# EAGLE board dust_environment_sensor_v2 (EAGLE 6.4)

Size 70 x 70 mm. Coordinates in mm from the lower left corner, seen from the top.
Outline: circle at 35,35 radius 35
Copper layers (1+2*15+16): Top 0.0356mm / dielectric 0.2007mm / VCC 0.017mm / dielectric 1.5mm / GND 0.017mm / dielectric 0.2007mm / Bottom 0.0356mm
Design rules "LaenPCBOrder_4LAYER": minimum track width 6mil, minimum drill 13mil, track to track 6mil, track to pad 6mil, pad to pad 6mil, via to via 6mil, smd to smd 6mil, copper to edge 15mil, drill to drill 6mil, minimum pad ring 7mil, minimum via ring 7mil, stop-mask expansion 4mil, vias tented up to drill 0mil, thermal gap 10mil
Net classes: 0 default: width 0.254 mm, drill 0.33 mm, clearance 0.152 mm; 1 power: width 0.254 mm, drill 0.33 mm, clearance 0.152 mm

## Footprints (pad centres in the part's own frame; a part is rotated, then mirrored left to right if it is on the bottom)
C0603 = smd 1.1 x 1: 1 -0.85,0; 2 0.85,0
EIA3216-KIT = smd 1.9 x 1.6: A 1.65,0; C -1.65,0
EIA7343 = smd 2.55 x 2.7: A 3.17,0; C -3.17,0
TQFP44 = smd 1.5 x 0.5: 1 -5.8,4; 2 -5.8,3.2; 3 -5.8,2.4; 4 -5.8,1.6; 5 -5.8,0.8; 6 -5.8,0; 7 -5.8,-0.8; 8 -5.8,-1.6; 9 -5.8,-2.4; 10 -5.8,-3.2; 11 -5.8,-4; 23 5.8,-4; 24 5.8,-3.2; 25 5.8,-2.4; 26 5.8,-1.6; 27 5.8,-0.8; 28 5.8,0; 29 5.8,0.8; 30 5.8,1.6; 31 5.8,2.4; 32 5.8,3.2; 33 5.8,4 | smd 0.5 x 1.5: 12 -4,-5.8; 13 -3.2,-5.8; 14 -2.4,-5.8; 15 -1.6,-5.8; 16 -0.8,-5.8; 17 0,-5.8; 18 0.8,-5.8; 19 1.6,-5.8; 20 2.4,-5.8; 21 3.2,-5.8; 22 4,-5.8; 34 4,5.8; 35 3.2,5.8; 36 2.4,5.8; 37 1.6,5.8; 38 0.8,5.8; 39 0,5.8; 40 -0.8,5.8; 41 -1.6,5.8; 42 -2.4,5.8; 43 -3.2,5.8; 44 -4,5.8
BX0036 = drill 1.1 pad 2.54: NEG 27.8,0 | drill 1.1 pad 2.54 square: POS -27.8,0 | hole 3.8: 15.9,0; -15.9,0
2X3 = drill 1.016 pad 1.88 octagon: 1 0,0; 2 0,2.54; 3 2.54,0; 4 2.54,2.54; 5 5.08,0; 6 5.08,2.54
XBEE_1-10_SMT = smd 2.29 x 0.89: 1 -12.395,9; 2 -9.605,7; 3 -12.395,5; 4 -9.605,3; 5 -12.395,1; 6 -9.605,-1; 7 -12.395,-3; 8 -9.605,-5; 9 -12.395,-7; 10 -9.605,-9
XBEE_11-20_SMT = smd 2.29 x 0.89: 11 12.395,-9; 12 9.605,-7; 13 12.395,-5; 14 9.605,-3; 15 12.395,-1; 16 9.605,1; 17 12.395,3; 18 9.605,5; 19 12.395,7; 20 9.605,9
1X01 = drill 1.016 pad 1.88: 1 0,0
1X06 = drill 1.016: 1 0,0; 2 2.54,0; 3 5.08,0; 4 7.62,0; 5 10.16,0; 6 12.7,0
AVR_ICSP = drill 1.016 pad 1.88 octagon: 1 -1.27,5.08; 2 1.27,5.08; 3 -1.27,2.54; 4 1.27,2.54; 5 -1.27,0; 6 1.27,0; 7 -1.27,-2.54; 8 1.27,-2.54; 9 -1.27,-5.08; 10 1.27,-5.08
CHIPLED_0805 = smd 1.2 x 1.2: A 0,-1.05; C 0,1.05
R0603 = smd 1 x 1.1: 1 -0.85,0; 2 0.85,0
STAND-OFF = hole 3.302: 0,0
LGA16_ST = smd 1 x 0.3: 1 -1.55,1; 2 -1.55,0.5; 3 -1.55,0; 4 -1.55,-0.5; 5 -1.55,-1; 9 1.55,-1; 10 1.55,-0.5; 11 1.55,0; 12 1.55,0.5; 13 1.55,1 | smd 0.3 x 1: 6 -0.5,-1.55; 7 0,-1.55; 8 0.5,-1.55; 14 0.5,1.55; 15 0,1.55; 16 -0.5,1.55
QFN24_SILICON_LABS = smd 1 x 0.3: 1 -2.125,1.25; 2 -2.125,0.75; 3 -2.125,0.25; 4 -2.125,-0.25; 5 -2.125,-0.75; 6 -2.125,-1.25; 13 2.125,-1.25; 14 2.125,-0.75; 15 2.125,-0.25; 16 2.125,0.25; 17 2.125,0.75; 18 2.125,1.25 | smd 0.3 x 1: 7 -1.25,-2.125; 8 -0.75,-2.125; 9 -0.25,-2.125; 10 0.25,-2.125; 11 0.75,-2.125; 12 1.25,-2.125; 19 1.25,2.125; 20 0.75,2.125; 21 0.25,2.125; 22 -0.25,2.125; 23 -0.75,2.125; 24 -1.25,2.125 | smd 2.75 x 2.75: PAD 0,0
CL6_TAOS = smd 1 x 0.7: 1 -1.45,-1.05; 2 1.45,-1.05; 3 1.45,0; 4 1.45,1.05; 5 -1.45,1.05; 6 -1.45,0
AMN41121 = drill 0.635 pad 1.676: GND 0,-2.54; OUT -2.54,0; VDD 0,2.54
LGA16_4X4_ST = smd 1 x 0.3: 1 -2,0.975; 2 -2,0.325; 3 -2,-0.325; 4 -2,-0.975; 9 2,-0.975; 10 2,-0.325; 11 2,0.325; 12 2,0.975 | smd 0.3 x 1: 5 -0.975,-2; 6 -0.325,-2; 7 0.325,-2; 8 0.975,-2; 13 0.975,2; 14 0.325,2; 15 -0.325,2; 16 -0.975,2
SOT23-3 = smd 0.8 x 0.9: 1 -0.95,-1; 2 0.95,-1; 3 0,1.1
ABS07 = smd 1.1 x 1.9: 1 -1.25,0; 2 1.25,0

## Placement (x,y rotation side)
C1  100n  [C0603]  62,52 0 top
C2  10u  [C0603]  62,49 0 top
C3  100n  [C0603]  59,19 0 top
C4  100u  [EIA3216-KIT]  9,42 0 top
C5  100n  [C0603]  57,33 0 top
C6  680u  [EIA7343]  22,47 90 top
C7  4.7u  [C0603]  54,29 270 top
C8  100n  [C0603]  44,55 270 top
C9  100n  [C0603]  27,54 90 top
C10  100n  [C0603]  6.5,28.5 180 top
C11  10p  [C0603]  41.5,63 0 top
C12  10p  [C0603]  34,63 180 top
C13  100n  [C0603]  54,22 90 top
C14  10u  [C0603]  55,43 90 top
C15  100n  [C0603]  63,43 90 top
C16  1u  [C0603]  14.9,41.54 270 top
C17  1u  [C0603]  15.46,49.08 0 top
C18  100n  [C0603]  19,29 0 top
IC2  ATMEGA644A  [TQFP44]  36,54 90 top
J1  3.6V Lithium C cell  [BX0036]  35,36 180 bottom
J2  EXP  [2X3]  50,57 90 top
J3  XBEE_1-10SMT  [XBEE_1-10_SMT]  35,20 0 top
J4  XBEE_11-20SMT  [XBEE_11-20_SMT]  35,20 0 top
JP4  M01PTH  [1X01]  63,19 0 top
JP5  M01PTH  [1X01]  18.75,7.94 0 top
JP6  M01PTH  [1X01]  7,46.75 0 top
JP7  M01PTH  [1X01]  9,17 0 top
JP8  [1X06]  3,41 270 top
JP9  JTAG  [AVR_ICSP]  35,67 270 top
LED2  [CHIPLED_0805]  46.5,51.75 270 top
LED3  [CHIPLED_0805]  46.5,50 270 top
R1  2.2k  [R0603]  50.95,53 90 top
R2  2.2k  [R0603]  53,53 90 top
R3  15  [R0603]  56,35.54 270 top
R4  10k  [R0603]  9.75,27.5 270 top
R5  0R DNP  [R0603]  11,46 270 top
R6  10k  [R0603]  20.24,54.02 180 top
STANDOFF1  STAND-OFF  [STAND-OFF]  14,13 0 top
STANDOFF2  STAND-OFF  [STAND-OFF]  14,58 0 top
STANDOFF3  STAND-OFF  [STAND-OFF]  57,13 0 top
STANDOFF4  STAND-OFF  [STAND-OFF]  57,58 0 top
U2  LIS3DH  [LGA16_ST]  58.18,46.05 0 top
U3  SI7005  [QFN24_SILICON_LABS]  59.09,29.06 270 top
U4  TSL2560  [CL6_TAOS]  58.72,22.43 0 top
U5  AMN41121  [AMN41121]  22,61 0 top
U6  L3GD20  [LGA16_4X4_ST]  59,40 0 top
U7  MCP1700-3.3V  [SOT23-3]  15.54,45.78 180 top
X2  32.768KHz  [ABS07]  37.75,63 0 top

## Library data of the parts
C1-C3 C5 C7-C18 = rcl
C4 C6 = SparkFun-Capacitors
IC2 = atmel; MPN: ATMEGA644PV-10AU; OC_FARNELL: 1455123; OC_NEWARK: 58M3748
J1 J3 J4 U2-U7 = Cool_Electricity
J2 JP4-JP7 JP9 = SparkFun-Connectors
JP8 = custom
LED2 LED3 = led
R1-R6 = resistor
STANDOFF1-STANDOFF4 = SparkFun-Electromechanical
X2 = WSNlib

## Nets
ACCEL_INT1: IC2.37 U2.11
ACCEL_INT2: IC2.36 U2.9
ATMEGA_TO_FTDI: IC2.10 JP8.5
EXP_CSN: IC2.44 J2.5
EXP_MISO: IC2.2 J2.1
EXP_MOSI: IC2.1 J2.4
EXP_SCK: IC2.3 J2.3
FTDI_TO_ATMEGA: IC2.9 JP8.4
GND: C1.2 C2.2 C3.2 C4.C C5.2 C6.C C7.2 C8.1 C9.1 C11.2 C12.2 C13.2 C14.2 C15.2 C16.2 C17.2 C18.1 IC2.6 IC2.18 IC2.28 IC2.39 J1.NEG J2.6 J3.10 JP4.1 JP5.1 JP6.1 JP7.1 JP8.1 JP8.2 JP9.2 JP9.10 LED2.C LED3.C R6.1 U2.5 U2.10 U2.12 U3.1 U3.8 U3.11 U3.19 U3.PAD U4.2 U4.3 U5.GND U6.8 U6.9 U6.10 U6.11 U6.12 U6.13 U7.1
GYRO_INT2: IC2.43 U6.6
HUMID_CS: IC2.35 U3.15
HUMID_VCC: IC2.34 R3.1
I2C_SCL: IC2.19 R1.1 U2.4 U3.3 U4.4 U6.2
I2C_SDA: IC2.20 R2.1 U2.6 U3.4 U4.5 U6.3
LED1: IC2.14 LED2.A
LED2: IC2.13 LED3.A
LIGHT_INT: IC2.31 U4.6
MOTE_API_RX: IC2.12 J3.3
MOTE_API_TX: IC2.11 J3.2
MOTE_ASSOC: IC2.41 J4.15
MOTE_RESETN: IC2.33 J3.5
MOTE_RX_RTSN: IC2.15 J4.16
MOTE_SLEEPN: IC2.32 J3.9
MOTE_STATUS: IC2.42 J4.13
MOTE_TX_CTSN: IC2.40 J4.12
N$1: C7.1 U3.10
N$2: C15.1 U6.14
N$6: C11.1 IC2.25 X2.2
N$7: C12.1 IC2.26 X2.1
N$11: C5.1 R3.2 U3.9
PIR_OUT: IC2.16 R6.2 U5.OUT
PIR_VCC: IC2.30 U5.VDD
RST: C10.1 IC2.4 JP9.6 R4.1
RTS#: C10.2 JP8.6
TCK: IC2.21 JP9.1
TDI: IC2.24 JP9.9
TDO: IC2.23 JP9.3
TMS: IC2.22 JP9.5
VBATT: C4.A C16.1 J1.POS J2.2 JP8.3 R5.2 U7.3
VCC: C1.1 C2.1 C3.1 C6.A C8.2 C9.2 C13.1 C14.1 C17.1 C18.2 IC2.5 IC2.17 IC2.27 IC2.38 J3.1 JP9.4 R1.2 R2.2 R4.2 R5.1 U2.1 U2.7 U2.8 U2.14 U4.1 U6.1 U6.4 U6.5 U6.15 U6.16 U7.2

## Tracks (layer width: path | path; a pad name or v marks a point on that pad's centre or on a via)
ACCEL_INT1  (1 unrouted)
ACCEL_INT2  (1 unrouted)
ATMEGA_TO_FTDI  (1 unrouted)
EXP_CSN  (1 unrouted)
EXP_MISO  (1 unrouted)
EXP_MOSI  (1 unrouted)
EXP_SCK  (1 unrouted)
FTDI_TO_ATMEGA  (1 unrouted)
GND  (52 unrouted)
GYRO_INT2  (1 unrouted)
HUMID_CS  (1 unrouted)
HUMID_VCC  (1 unrouted)
I2C_SCL  (5 unrouted)
I2C_SDA  (5 unrouted)
LED1  (1 unrouted)
LED2  (1 unrouted)
LIGHT_INT  (1 unrouted)
MOTE_API_RX  (1 unrouted)
MOTE_API_TX  (1 unrouted)
MOTE_ASSOC  (1 unrouted)
MOTE_RESETN  (1 unrouted)
MOTE_RX_RTSN  (1 unrouted)
MOTE_SLEEPN  (1 unrouted)
MOTE_STATUS  (1 unrouted)
MOTE_TX_CTSN  (1 unrouted)
N$1  (1 unrouted)
N$2  (1 unrouted)
N$6  (2 unrouted)
N$7  (2 unrouted)
N$11  (2 unrouted)
PIR_OUT  (2 unrouted)
PIR_VCC  (1 unrouted)
RST  (3 unrouted)
RTS#  (1 unrouted)
TCK  (1 unrouted)
TDI  (1 unrouted)
TDO  (1 unrouted)
TMS  (1 unrouted)
VBATT  (6 unrouted)
VCC  (30 unrouted)

## Text on the board
tNames: JTAG | EXP | FTDI | U4
bNames: NEGATIVE | POSITIVE | Environmental Sensor PCB / Kevin Weekly